# EAGLE board output-reduced (EAGLE 7.3.0)
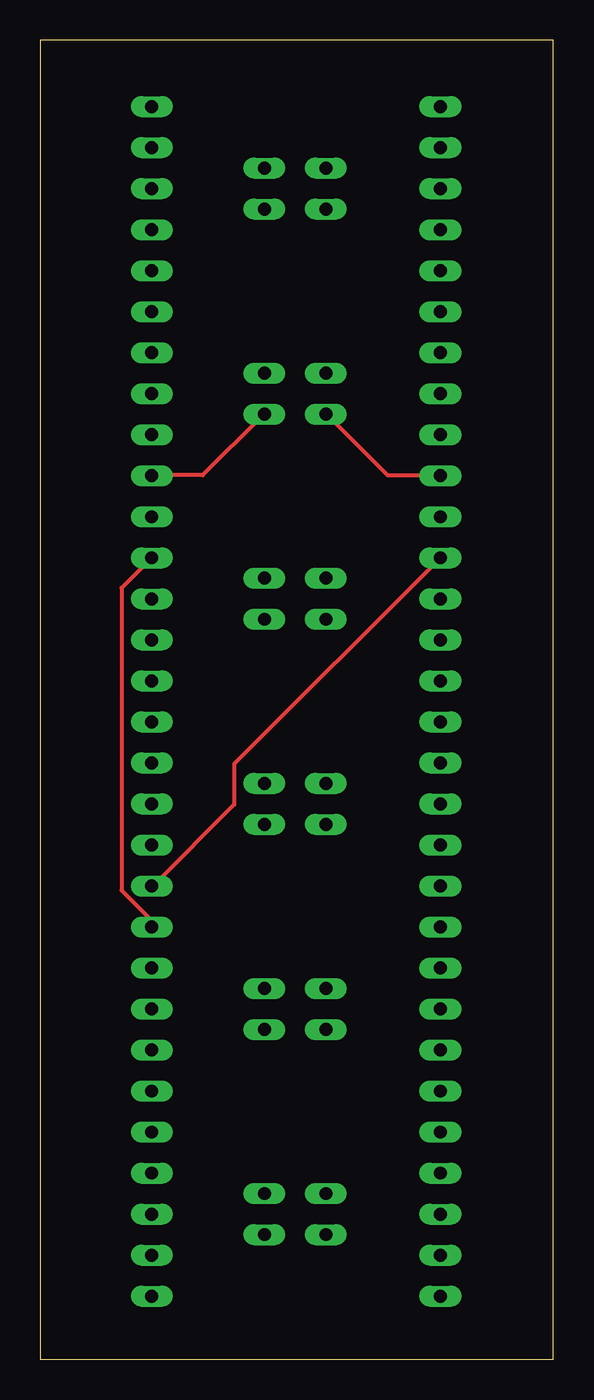
[diagram p0: board, top side]

Size 31.78 x 81.66 mm. Coordinates in mm from the lower left corner, seen from the top.
Outline: 0,0 31.78,0 31.78,81.66 0,81.66 0,0
Copper layers (1*16): Top 0.035mm / dielectric 1.5mm / Bottom 0.035mm
Design rules "default *": minimum track width 10mil, minimum drill 24mil, track to track 12mil, track to pad 10mil, pad to pad 8mil, via to via 8mil, smd to smd 8mil, copper to edge 40mil, drill to drill 8mil, minimum pad ring 10mil, minimum via ring 8mil, stop-mask expansion 4mil, vias tented up to drill 0mil, thermal gap 10mil

## Footprints (pad centres in the part's own frame; a part is rotated, then mirrored left to right if it is on the bottom)
1X01_OVAL_PIN_AUTO = drill 0.8 long: P$1 0,0

## Placement (x,y rotation side)
LL0  [1X01_OVAL_PIN_AUTO]  6.9,77.56 0 top
LL1  [1X01_OVAL_PIN_AUTO]  6.9,75.02 0 top
LL2  [1X01_OVAL_PIN_AUTO]  6.9,72.48 0 top
LL3  [1X01_OVAL_PIN_AUTO]  6.9,69.94 0 top
LL4  [1X01_OVAL_PIN_AUTO]  6.9,67.4 0 top
LL5  [1X01_OVAL_PIN_AUTO]  6.9,64.86 0 top
LL6  [1X01_OVAL_PIN_AUTO]  6.9,62.32 0 top
LL7  [1X01_OVAL_PIN_AUTO]  6.9,59.78 0 top
LL8  [1X01_OVAL_PIN_AUTO]  6.9,57.24 0 top
LL9  [1X01_OVAL_PIN_AUTO]  6.9,54.7 0 top
LL10  [1X01_OVAL_PIN_AUTO]  6.9,52.16 0 top
LL11  [1X01_OVAL_PIN_AUTO]  6.9,49.62 0 top
LL12  [1X01_OVAL_PIN_AUTO]  6.9,47.08 0 top
LL13  [1X01_OVAL_PIN_AUTO]  6.9,44.54 0 top
LL14  [1X01_OVAL_PIN_AUTO]  6.9,42 0 top
LL15  [1X01_OVAL_PIN_AUTO]  6.9,39.46 0 top
LL16  [1X01_OVAL_PIN_AUTO]  6.9,36.92 0 top
LL17  [1X01_OVAL_PIN_AUTO]  6.9,34.38 0 top
LL18  [1X01_OVAL_PIN_AUTO]  6.9,31.84 0 top
LL19  [1X01_OVAL_PIN_AUTO]  6.9,29.3 0 top
LL20  [1X01_OVAL_PIN_AUTO]  6.9,26.76 0 top
LL21  [1X01_OVAL_PIN_AUTO]  6.9,24.22 0 top
LL22  [1X01_OVAL_PIN_AUTO]  6.9,21.68 0 top
LL23  [1X01_OVAL_PIN_AUTO]  6.9,19.14 0 top
LL24  [1X01_OVAL_PIN_AUTO]  6.9,16.6 0 top
LL25  [1X01_OVAL_PIN_AUTO]  6.9,14.06 0 top
LL26  [1X01_OVAL_PIN_AUTO]  6.9,11.52 0 top
LL27  [1X01_OVAL_PIN_AUTO]  6.9,8.98 0 top
LL28  [1X01_OVAL_PIN_AUTO]  6.9,6.44 0 top
LL29  [1X01_OVAL_PIN_AUTO]  6.9,3.9 0 top
LS0  [1X01_OVAL_PIN_AUTO]  13.88,73.75 0 top
LS1  [1X01_OVAL_PIN_AUTO]  13.88,71.21 0 top
LS2  [1X01_OVAL_PIN_AUTO]  13.88,61.05 0 top
LS3  [1X01_OVAL_PIN_AUTO]  13.88,58.51 0 top
LS4  [1X01_OVAL_PIN_AUTO]  13.88,48.35 0 top
LS5  [1X01_OVAL_PIN_AUTO]  13.88,45.81 0 top
LS6  [1X01_OVAL_PIN_AUTO]  13.88,35.65 0 top
LS7  [1X01_OVAL_PIN_AUTO]  13.88,33.11 0 top
LS8  [1X01_OVAL_PIN_AUTO]  13.88,22.95 0 top
LS9  [1X01_OVAL_PIN_AUTO]  13.88,20.41 0 top
LS10  [1X01_OVAL_PIN_AUTO]  13.88,10.25 0 top
LS11  [1X01_OVAL_PIN_AUTO]  13.88,7.71 0 top
RL0  [1X01_OVAL_PIN_AUTO]  24.78,77.56 0 top
RL1  [1X01_OVAL_PIN_AUTO]  24.78,75.02 0 top
RL2  [1X01_OVAL_PIN_AUTO]  24.78,72.48 0 top
RL3  [1X01_OVAL_PIN_AUTO]  24.78,69.94 0 top
RL4  [1X01_OVAL_PIN_AUTO]  24.78,67.4 0 top
RL5  [1X01_OVAL_PIN_AUTO]  24.78,64.86 0 top
RL6  [1X01_OVAL_PIN_AUTO]  24.78,62.32 0 top
RL7  [1X01_OVAL_PIN_AUTO]  24.78,59.78 0 top
RL8  [1X01_OVAL_PIN_AUTO]  24.78,57.24 0 top
RL9  [1X01_OVAL_PIN_AUTO]  24.78,54.7 0 top
RL10  [1X01_OVAL_PIN_AUTO]  24.78,52.16 0 top
RL11  [1X01_OVAL_PIN_AUTO]  24.78,49.62 0 top
RL12  [1X01_OVAL_PIN_AUTO]  24.78,47.08 0 top
RL13  [1X01_OVAL_PIN_AUTO]  24.78,44.54 0 top
RL14  [1X01_OVAL_PIN_AUTO]  24.78,42 0 top
RL15  [1X01_OVAL_PIN_AUTO]  24.78,39.46 0 top
RL16  [1X01_OVAL_PIN_AUTO]  24.78,36.92 0 top
RL17  [1X01_OVAL_PIN_AUTO]  24.78,34.38 0 top
RL18  [1X01_OVAL_PIN_AUTO]  24.78,31.84 0 top
RL19  [1X01_OVAL_PIN_AUTO]  24.78,29.3 0 top
RL20  [1X01_OVAL_PIN_AUTO]  24.78,26.76 0 top
RL21  [1X01_OVAL_PIN_AUTO]  24.78,24.22 0 top
RL22  [1X01_OVAL_PIN_AUTO]  24.78,21.68 0 top
RL23  [1X01_OVAL_PIN_AUTO]  24.78,19.14 0 top
RL24  [1X01_OVAL_PIN_AUTO]  24.78,16.6 0 top
RL25  [1X01_OVAL_PIN_AUTO]  24.78,14.06 0 top
RL26  [1X01_OVAL_PIN_AUTO]  24.78,11.52 0 top
RL27  [1X01_OVAL_PIN_AUTO]  24.78,8.98 0 top
RL28  [1X01_OVAL_PIN_AUTO]  24.78,6.44 0 top
RL29  [1X01_OVAL_PIN_AUTO]  24.78,3.9 0 top
RS0  [1X01_OVAL_PIN_AUTO]  17.69,73.75 0 top
RS1  [1X01_OVAL_PIN_AUTO]  17.69,71.21 0 top
RS2  [1X01_OVAL_PIN_AUTO]  17.69,61.05 0 top
RS3  [1X01_OVAL_PIN_AUTO]  17.69,58.51 0 top
RS4  [1X01_OVAL_PIN_AUTO]  17.69,48.35 0 top
RS5  [1X01_OVAL_PIN_AUTO]  17.69,45.81 0 top
RS6  [1X01_OVAL_PIN_AUTO]  17.69,35.65 0 top
RS7  [1X01_OVAL_PIN_AUTO]  17.69,33.11 0 top
RS8  [1X01_OVAL_PIN_AUTO]  17.69,22.95 0 top
RS9  [1X01_OVAL_PIN_AUTO]  17.69,20.41 0 top
RS10  [1X01_OVAL_PIN_AUTO]  17.69,10.25 0 top
RS11  [1X01_OVAL_PIN_AUTO]  17.69,7.71 0 top

## Library data of the parts
LL0 LL1-LL29 LS0 LS1-LS11 RL0 RL1-RL29 RS0 RS1-RS11 = SparkFun-Connectors

## Nets
SIGNAL0: LL19.P$1 RL11.P$1
SIGNAL1: LL11.P$1 LL20.P$1
SIGNAL2: LL9.P$1 LS3.P$1
SIGNAL3: RL9.P$1 RS3.P$1

## Tracks (layer width: path | path; a pad name or v marks a point on that pad's centre or on a via)
SIGNAL0
  Top 0.254: LL19.P$1 6.99,29.31 12.01,34.34 12.01,36.86 24.59,49.43 RL11.P$1
SIGNAL1
  Top 0.254: LL20.P$1 6.71,26.8 6.71,27.36 5.03,29.03 5.03,47.75 6.71,49.43 LL11.P$1
SIGNAL2
  Top 0.254: LL9.P$1 6.99,54.74 10.06,54.74 13.69,58.37 LS3.P$1
SIGNAL3
  Top 0.254: RL9.P$1 24.59,54.74 21.51,54.74 17.88,58.37 RS3.P$1